# Altium PCB WSN_v1.PcbDoc
Units mil, origin at the board's own origin, x right, y up, seen from the top; angles counter-clockwise.
Board outline 1968.5 x 2165.35 mil, 2 copper layers (Top Layer, Bottom Layer); 39 components, 56 nets, 232 pads, 66 vias.
Unrouted connection lines stored in the file: 2.
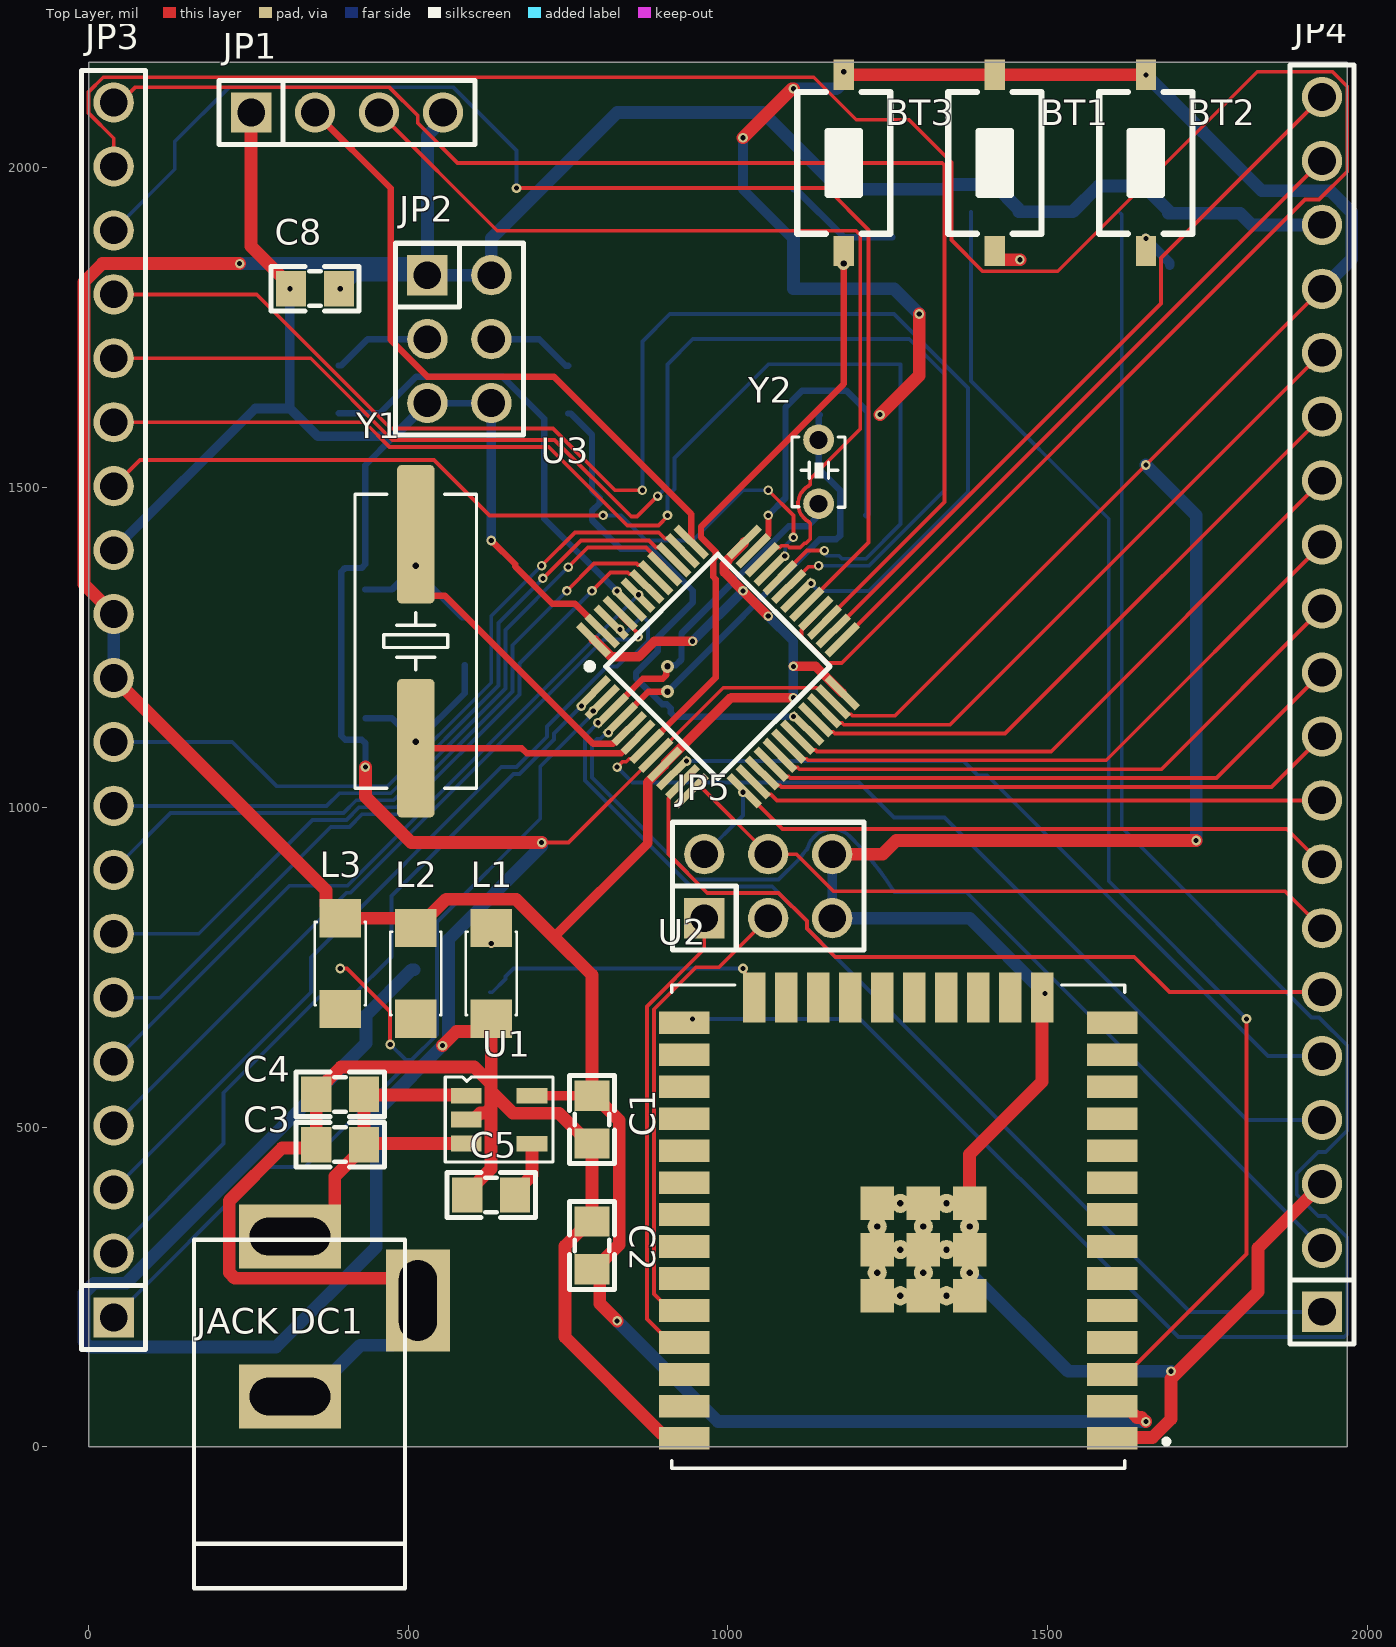
[diagram p0: Top Layer view]
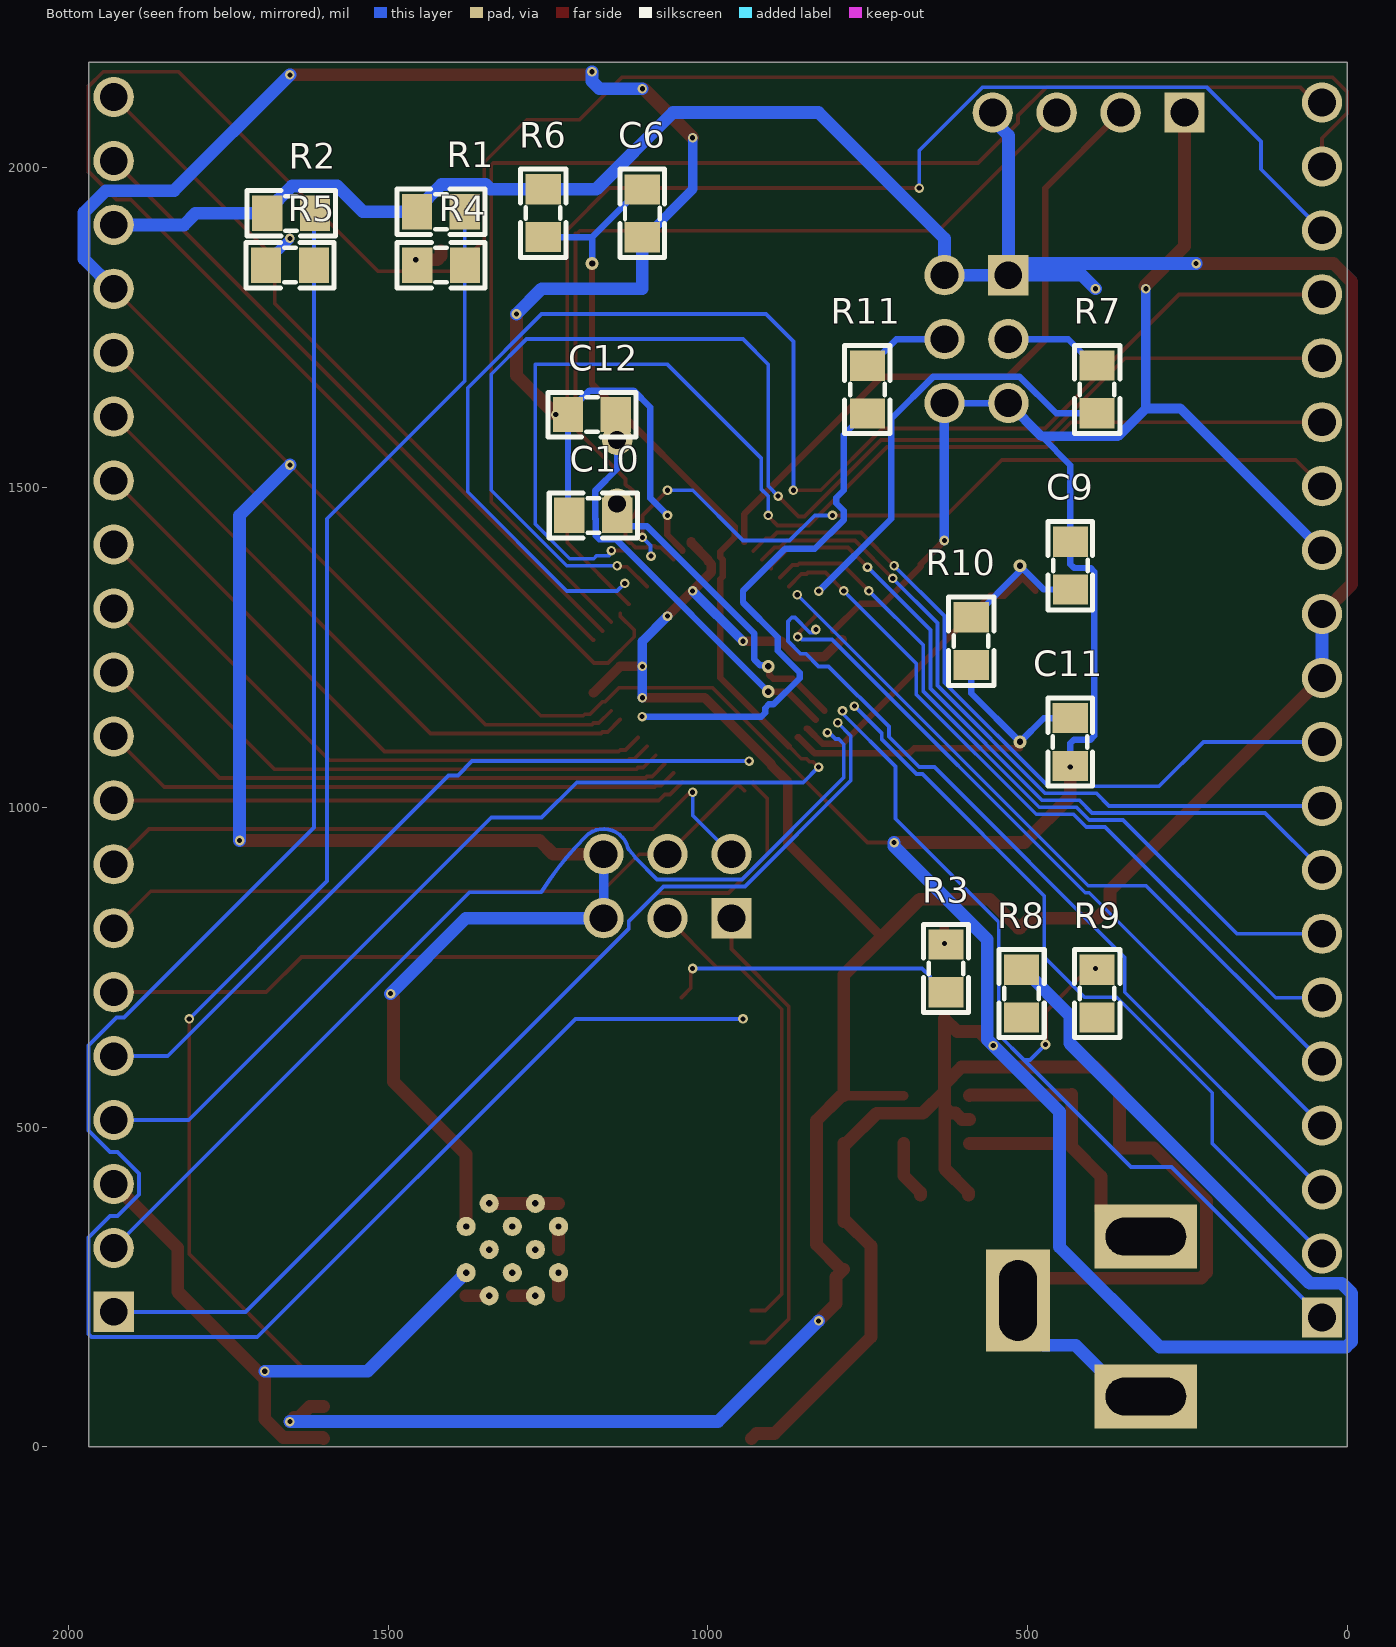
[diagram p1: Bottom Layer view, seen from below]
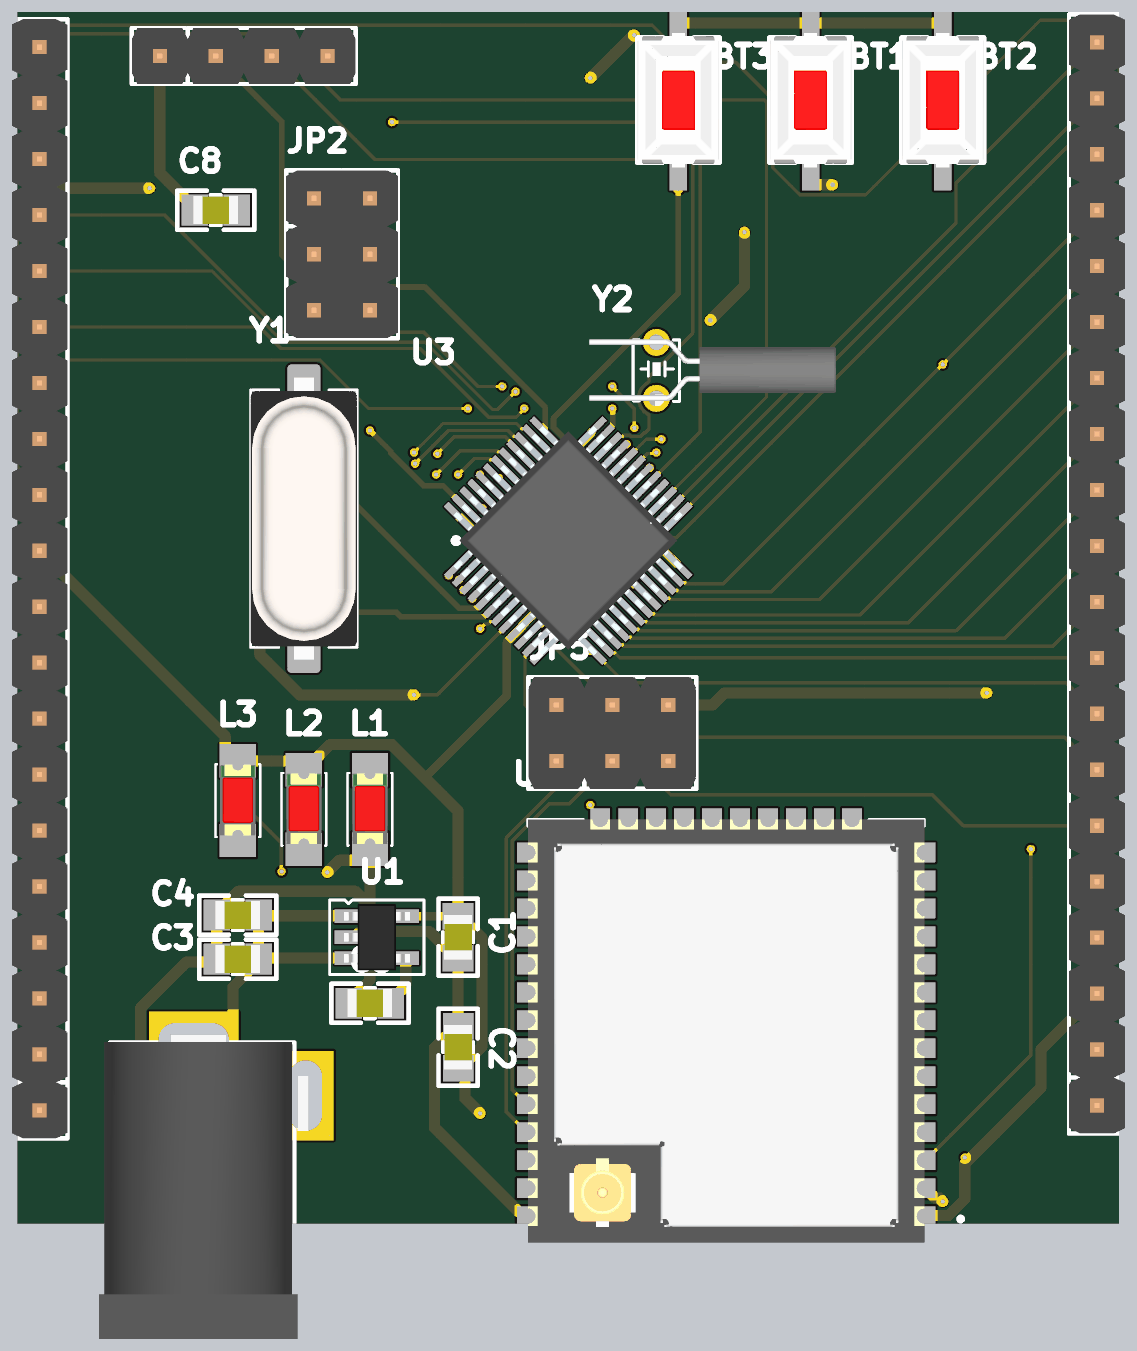
[diagram p2: 3D render of the assembled board from above, using the file's embedded part models]
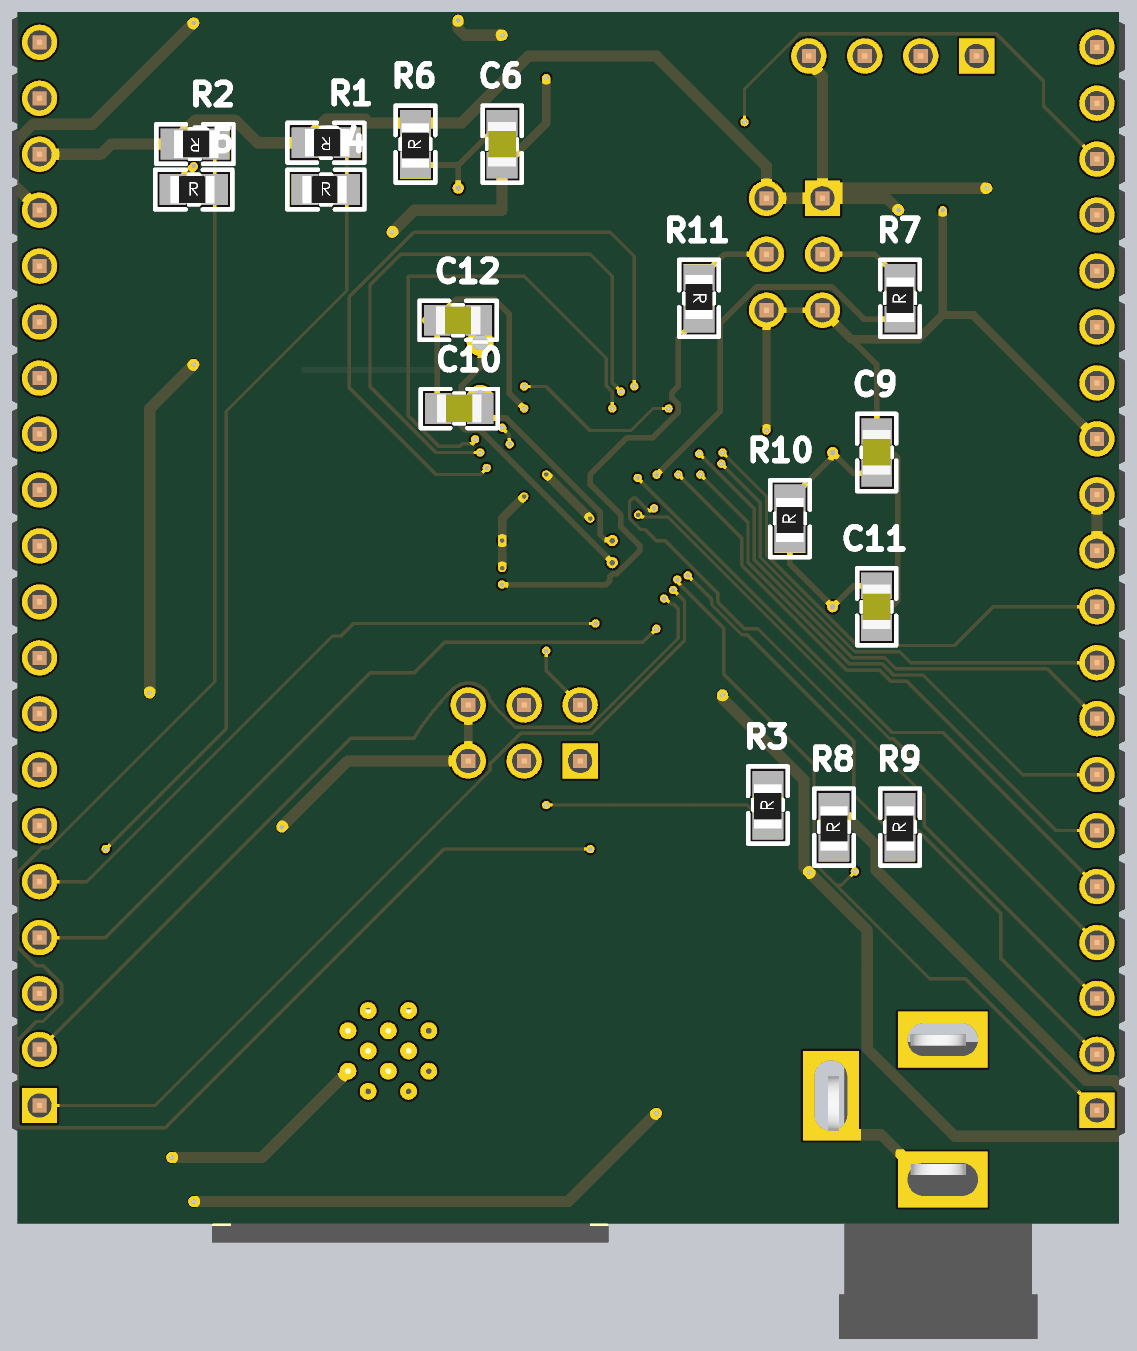
[diagram p3: 3D render of the assembled board from below, using the file's embedded part models]

## Layer stack, top to bottom
Top Solder: solder mask 0.4, Solder Resist, Dk 3.5
Top Layer: signal copper 1.4
Dielectric 1: dielectric 12.6, FR-4, Dk 4.8
Bottom Layer: signal copper 1.4
Bottom Solder: solder mask 0.4, Solder Resist, Dk 3.5

## Board outline
0,0 1968.5,0 1968.5,2165.35 0,2165.35

## Design rules (kind name [scope] priority, off if disabled: settings)
Clearance [All] p1: gap=5 ignorepadtopadclearanceinfootprint=FALSE
PolygonConnect [All] p1: connectstyle=Relief reliefconductorwidth=10 reliefentries=4 polygonreliefangle="90 Angle" airgapwidth=10
RoutingVias [All] p1: holewidth=28 width=50 viastyle="Through Hole" minholewidth=8 minwidth=15 maxholewidth=15 maxwidth=30
SolderMaskExpansion [All] p1: expansion=4 istentingtop=FALSE
Width [All] p1: maxlimit=20 minlimit=6 preferedwidth=15 minimp=50.000000 maximp=50.000000 favimp=50.000000
30 further rules are at their usual default settings.

## Components (designator, comment, footprint, x,y, rotation, side; value= is the part's Value field where it differs from the comment)
BT1 "Nut Nhan 2 Chan SMD 3x6x2.5" "Nut Nhan 2 Chan SMD 3x6x2.5" 1417.32,2007.87 r90 top
BT2 "Nut Nhan 2 Chan SMD 3x6x2.5" "Nut Nhan 2 Chan SMD 3x6x2.5" 1653.54,2007.87 r90 top
BT3 "Nut Nhan 2 Chan SMD 3x6x2.5" "Nut Nhan 2 Chan SMD 3x6x2.5" 1181.1,2007.87 r270 top
C1 "104" "tu 0805" 787.4,511.81 r270 top
C2 "104" "tu 0805" 787.4,314.96 r90 top
C3 "104" "tu 0805" 393.7,472.44 r180 top
C4 "104" "tu 0805" 393.7,551.18 r180 top
C5 "104" "tu 0805" 629.92,393.7 r180 top
C6 "104" "tu 0805" 1102.36,1929.13 r270 bottom
C8 "104" "tu 0805" 354.33,1811.02 r180 top
C9 "20pF" "tu 0805" 433.07,1377.95 r90 bottom
C10 "20pF" "tu 0805" 1178.96,1456.56 r0 bottom
C11 "20pF" "tu 0805" 433.07,1102.36 r270 bottom
C12 "20pF" "tu 0805" 1181.1,1614.17 r0 bottom
"JACK DC1" "JACK DC 5.5" "JACK DC 5.5" 414.96,203.74 r90 top value="Jac DC"
JP1 "JP 1x4 2.54" "JP 1x4 DT" 254.33,2086.61 r0 top
JP2 "JP 2x3 2.54" "JP 2x3 DT" 579.92,1732.28 r270 top
JP3 "JP 1x20 2.54" "JP 1x20 DT" 39.37,202.36 r90 top
JP4 "JP 1x20 2.54" "JP 1x20 DT" 1929.13,211.02 r90 top
JP5 "JP 2x3 2.54" "JP 2x3 DT" 1062.99,876.77 r0 top
L1 "LED 0805" LED-1206-Red 629.92,811.29 r270 top
L2 "LED 0805" LED-1206-Red 511.81,811.29 r270 top
L3 "LED 0805" LED-1206-Red 393.7,826.77 r270 top
R1 "12k" "tro smd 0805" 1417.32,1929.13 r0 bottom
R2 "12k" "tro smd 0805" 1651.4,1926.74 r0 bottom
R3 "300R" "Tro SMD 0805" 629.92,748.03 r90 bottom
R4 "470R" "Tro SMD 0805" 1417.32,1850.39 r180 bottom
R5 "470R" "Tro SMD 0805" 1653.54,1850.39 r180 bottom
R6 "10k" "tro smd 0805" 1259.84,1929.13 r90 bottom
R7 "100k" "tro smd 0805" 393.7,1653.54 r90 bottom
R8 "300R" "Tro SMD 0805" 511.81,708.66 r90 bottom
R9 "300R" "Tro SMD 0805" 393.7,708.66 r90 bottom
R10 "1M" "tro smd 0805" 590.55,1259.84 r90 bottom
R11 "100k" "tro smd 0805" 748.03,1653.54 r270 bottom
U1 "RT9193-33GB" SOT23-5 642.13,511.71 r270 top
U2 "ESP32-WROOM-32U" XCVR_ESP32-WROOM-32U 1266.34,344.29 r180 top
U3 "STM32F103C8T6" LQFP-48_19.6_393_58X11_SMD 984.25,1220.47 r45 top
Y1 "8Mhz" "Thach Anh 2 chan SMD" 511.81,1259.84 r90 top value=4Mhz
Y2 "32.768khz" "Thach Anh 2 Chan 32,768 KHz" 1141.73,1574.8 r0 top value=4Mhz

## Footprints (in the part's own frame and the unit in brackets; to place one, negate y for a bottom-side part, rotate by r counter-clockwise, add the part's x,y. Pads: shape width x height; smd on the part's side, far side on the other; paste and mask are expansions set on the pad)
"JACK DC 5.5" [mil] "Jac DC input"
  rect 100x160 hole 59.06 slot 125.98 at 90 deg: 1(125,100) 2(-125,100)
  rect 160x100 hole 59.06 slot 125.98 at 0 deg: 3(25,-100)
  silkscreen extent -425,-80 120,250, body extent -410,-105 134,269, height 434
"JP 1x4 DT" [mm] "4 pins, 1 row, straight, gold plating"
  rect 1.6x1.6 hole 1.1: 1(0,0)
  round 1.6 hole 1.1: 2(2.54,0) 3(5.08,0) 4(7.62,0)
  silkscreen extent -1.27,-1.27 8.89,1.27, body extent -1.27,-1.27 8.89,1.27, height 8.54
"JP 1x20 DT" [mm] "20 pins, 1 row, straight, gold plating"
  rect 1.6x1.6 hole 1.1: 1(0,0)
  round 1.6 hole 1.1: 2(2.54,0) 3(5.08,0) 4(7.62,0) 5(10.16,0) 6(12.7,0) 7(15.24,0) 8(17.78,0) 9(20.32,0) 10(22.86,0) 11(25.4,0) 12(27.94,0) 13(30.48,0) 14(33.02,0) 15(35.56,0) 16(38.1,0) 17(40.64,0) 18(43.18,0) 19(45.72,0) 20(48.26,0)
  silkscreen extent -1.27,-1.27 49.53,1.27, body extent -1.27,-1.27 49.53,1.27, height 8.54
"JP 2x3 DT" [mm]
  rect 1.6x1.6 hole 1.1: 1(-2.54,-1.27)
  round 1.6 hole 1.1: 2(0,-1.27) 3(2.54,-1.27) 4(2.54,1.27) 5(0,1.27) 6(-2.54,1.27)
  silkscreen extent -3.81,-2.54 3.81,2.54, body extent -3.81,-2.54 3.81,2.54, height 8.55
LED-1206-Red [mil]
  rect 60x65 smd: 1(0,0) 2(142,0)
  silkscreen extent 6,-40 136,40, body extent 7,-31 133,32, height 43
LQFP-48_19.6_393_58X11_SMD [mm]
  rect 1.7x0.3 smd mask+0.076: 1(-4.238,2.75) 2(-4.238,2.25) 3(-4.238,1.75) 4(-4.238,1.25) 5(-4.238,0.75) 6(-4.238,0.25) 7(-4.238,-0.25) 8(-4.238,-0.75) 9(-4.238,-1.25) 10(-4.238,-1.75) 11(-4.238,-2.25) 12(-4.238,-2.75) 25(4.238,-2.75) 26(4.238,-2.25) 27(4.238,-1.75) 28(4.238,-1.25) 29(4.238,-0.75) 30(4.238,-0.25) 31(4.238,0.25) 32(4.238,0.75) 33(4.238,1.25) 34(4.238,1.75) 35(4.238,2.25) 36(4.238,2.75)
  rect 0.3x1.7 smd mask+0.076: 13(-2.75,-4.238) 14(-2.25,-4.238) 15(-1.75,-4.238) 16(-1.25,-4.238) 17(-0.75,-4.238) 18(-0.25,-4.238) 19(0.25,-4.238) 20(0.75,-4.238) 21(1.25,-4.238) 22(1.75,-4.238) 23(2.25,-4.238) 24(2.75,-4.238) 37(2.75,4.238) 38(2.25,4.238) 39(1.75,4.238) 40(1.25,4.238) 41(0.75,4.238) 42(0.25,4.238) 43(-0.25,4.238) 44(-0.75,4.238) 45(-1.25,4.238) 46(-1.75,4.238) 47(-2.25,4.238) 48(-2.75,4.238)
  silkscreen extent -3.72,-3.15 3.15,3.72, body extent -4.5,-4.5 4.5,4.5, height 1.7
"Nut Nhan 2 Chan SMD 3x6x2.5" [mm] "Switch SMD type"
  rect 1.2x0.8 smd: 1(-3.5,0) 2(3.5,0)
  silkscreen extent -2.82,-1.85 2.82,1.85, body extent -3.05,-1.85 3.05,1.85, height 2.5
SOT23-5 [mm]
  rect 0.62x1.22 smd mask+0.076: 1(-0.953,-1.31) 2(-0.003,-1.31) 3(0.947,-1.31) 4(0.952,1.31) 5(-0.953,1.31)
  silkscreen extent -1.69,-2.14 1.69,2.14, body extent -1.5,-1.5 1.5,1.5, height 1.41
"Thach Anh 2 Chan 32,768 KHz" [mil]
  round 48 hole 28: 1(0,0) 2(0,-100)
  silkscreen extent -42,-106 42,4, body extent -120,-105 321,6, height 66
"Thach Anh 2 chan SMD" [mm]
  round 0.508 on Mech15: 0(0,0)
  rrect25% 5.5x1.5 smd: 1(-4.25,0) 2(4.25,0)
  silkscreen extent -5.84,-2.41 5.84,2.41, body extent -6.4,-2.41 6.4,2.42, height 4.29
"tro smd 0805" [mm]
  rect 1.2x1.4 smd: 1(-0.946,-0.061) 2(0.954,-0.061)
  silkscreen extent -1.75,-0.97 1.75,0.84, body extent -1.56,-0.76 1.44,0.64, height 0.53
"Tro SMD 0805" [mm]
  rect 1.2x1.4 smd: 1(-0.946,-0.061) 2(0.954,-0.061)
  silkscreen extent -1.75,-0.97 1.75,0.84, body extent -1.56,-0.76 1.44,0.64, height 0.53
"tu 0805" [mm]
  rect 1.2x1.4 smd: 1(-0.946,-0.003) 2(0.954,-0.003)
  silkscreen extent -1.75,-0.89 1.75,0.89, body extent -1.01,-0.64 1.01,0.63, height 0.61
XCVR_ESP32-WROOM-32U [mm]
  rect 2x0.9 smd: 1(-8.5,8.41) 2(-8.5,7.14) 3(-8.5,5.87) 4(-8.5,4.6) 5(-8.5,3.33) 6(-8.5,2.06) 7(-8.5,0.79) 8(-8.5,-0.48) 9(-8.5,-1.75) 10(-8.5,-3.02) 11(-8.5,-4.29) 12(-8.5,-5.56) 13(-8.5,-6.83) 14(-8.5,-8.1) 25(8.5,-8.1) 26(8.5,-6.83) 27(8.5,-5.56) 28(8.5,-4.29) 29(8.5,-3.02) 30(8.5,-1.75) 31(8.5,-0.48) 32(8.5,0.79) 33(8.5,2.06) 34(8.5,3.33) 35(8.5,4.6) 36(8.5,5.87) 37(8.5,7.14) 38(8.5,8.41)
  rect 0.9x2 smd: 15(-5.715,-9.1) 16(-4.445,-9.1) 17(-3.175,-9.1) 18(-1.905,-9.1) 19(-0.635,-9.1) 20(0.635,-9.1) 21(1.905,-9.1) 22(3.175,-9.1) 23(4.445,-9.1) 24(5.715,-9.1)
  rect 1.33x1.33 smd: G.1(0.835,2.745) G.2(-1,2.745) G.4(-2.835,2.745) G.5(0.835,0.91) G.6(-1,0.91) G.7(-2.835,0.91) G.8(0.835,-0.925) G.9(-1,-0.925) G.10(-2.835,-0.925)
  round 0.762 hole 0.254: G.11(-0.082,2.745) G.12(-1.917,2.745) G.13(0.835,1.827) G.14(-1,1.827) G.15(-2.835,1.827) G.16(-0.082,0.91) G.17(-1.917,0.91) G.18(0.835,-0.008) G.19(-1,-0.008) G.20(-2.835,-0.008) G.21(-0.082,-0.925) G.22(-1.917,-0.925)
  silkscreen extent -10.75,-9.6 9,9.6, body extent -9,-9.6 9,9.6, height 3.3

## Part data
C1 C2 C3 C4 C5 C6 C8: library part "Tu 0805 104 50V 10%", "Dán", Chung_Loai=Dán, Don_Vi=Con, Ma_Hang=MH004551, So_Chan=2, Ten_Linh_Kien="Tụ 0805 104-100nF 10% 50V"
C9 C10 C11 C12: library part "Tu 0805 20pF 50V 10%", "Dán", Chung_Loai=Dán, Don_Vi=Con, Ma_Hang=MH004558, So_Chan=2, Ten_Linh_Kien="Tụ 0805 20P 10% 50V"
JP1: library part "JP 1x4 2.54 Duc Thang", "Cắm", Chung_Loai=Cắm, Don_Vi=Con, Ma_Hang=MH000903, Ten_Linh_Kien="Jump Đơn Đực 2.54MM 1x40P Thẳng 11MM"
JP2 JP5: library part "JP 2x3 2.54 Duc Thang", "Cắm", Chung_Loai=Cắm, Don_Vi=Con, Ma_Hang=MH002686, Ten_Linh_Kien="Jump Đôi Đực 2.54MM 2x40P Thẳng 11MM"
JP3 JP4: library part "JP 1x20 2.54 Duc Thang", "Cắm", Chung_Loai=Cắm, Don_Vi=Con, Ma_Hang=MH000903, Ten_Linh_Kien="Jump Đơn Đực 2.54MM 1x40P Thẳng 11MM"
L1 L2 L3: library part "LED 1206 Do", "Dán", Chung_Loai=Dán, Don_Vi=Con, Ma_Hang=MH002334, Ten_Linh_Kien="LED1206 Màu Đỏ (Red)"
R1 R2: library part "Tro 0805 1% 12k", "Dán", Chung_Loai=Dán, Don_Vi=Con, Ma_Hang=MH005475, So_Chan=2, Ten_Linh_Kien="Trở 0805 1% 12k"
R3 R8 R9: library part "Tro 0805 5% 300R", "Dán", Chung_Loai=Dán, Don_Vi=Con, Ma_Hang=MH005335, So_Chan=2, Ten_Linh_Kien="Trở 0805 5% 300R"
R4 R5: library part "Tro 0805 5% 470R", "Dán", Chung_Loai=Dán, Don_Vi=Con, Ma_Hang=MH005341, So_Chan=2, Ten_Linh_Kien="Trở 0805 5% 470R"
R6: library part "Tro 0805 5% 10k", "Dán", Chung_Loai=Dán, Don_Vi=Con, Ma_Hang=MH005239, So_Chan=2, Ten_Linh_Kien="Trở 0805 5% 10k"
R7 R11: library part "Tro 0805 5% 100k", "Dán", Chung_Loai=Dán, Don_Vi=Con, Ma_Hang=MH005250, So_Chan=2, Ten_Linh_Kien="Trở 0805 5% 100k"
R10: library part "Tro 0805 5% 1M", "Dán", Chung_Loai=Dán, Don_Vi=Con, Ma_Hang=MH005235, So_Chan=2, Ten_Linh_Kien="Trở 0805 5% 1M"
U1: library part REG_5.5V-3.3V-0.3A-1W-SOT-23-5, "Linear Voltage Regulator IC 1 Output 300mA SOT-23-5", Alternate Part Number-1=NA, Case/Package=SOT-23-5, Manufacturer="Richtek USA Inc.", Supplier Part Number-1=C15651, Manufacturer Part Number=RT9193-33GB, Supplier-1=LCSC
U2: "Bluetooth, WiFi 802.11b/g/n, Bluetooth v4.2 +EDR, Class 1, 2 and 3 Transceiver Module 2.4GHz ~ 2.5GHz Antenna Not Included, U.FL Surface Mount", Package="NON STANDARD-39 Espressif", Availability="Not in stock", Check_prices=https://www.snapeda.com/parts/ESP32-WROOM-32U/Espressif+Systems/view-part/?ref=eda, MF="Espressif Systems", MP=ESP32-WROOM-32U, Price=None, SnapEDA_Link=https://www.snapeda.com/parts/ESP32-WROOM-32U/Espressif+Systems/view-part/?ref=snap
U3: library part IC_STM32F103C8T6, "ARM® Cortex®-M3 STM32F1 Microcontroller IC 32-Bit 72MHz 64KB (64K x 8) FLASH 48-LQFP (7x7)", Alternate Part Number-1=NA, Case/Package=LQFP48, Manufacturer=STMicroelectronics, Manufacturer Part Number=STM32F103C8T6, Supplier Part Number-1=STM32F103C8T6, Supplier-1=LCSC
Y1: library part "Thach Anh 2 chan SMD", "Crystal For all Crystal 2pin."
Y2: library part "Thach Anh 2 chan 32,768 Khz", "Crystal For all Crystal 2pin."
BT1 BT2 BT3: Ma_Hang=MH001036, Ten="Nút Nhấn 2 Chân 3x6x2.5MM SMD"

## Via types
v1: diameter 15, hole 8, Top Layer to Bottom Layer, 61 vias
v2: diameter 20, hole 10, Top Layer to Bottom Layer, 5 vias

## Nets (pads, with @x,y where several pads share a name; then routed paths per layer and width w, separated by ;. In a path a pad name is that pad's centre, name@x,y a point inside that pad or via, vN(x,y) a via of type N, cw(c..) or ccw(c..) an arc to the next point about the centre after c; other vN are vias at no path point)
5V: "JACK DC1.1" C3.1 C4.1 U1.1 U1.3 | length 609.1
  Top Layer w20: 314.96,328.74 344.96,328.74 384.96,368.74 384.96,422.67 430.93,468.64 C3.1 ; U1.3 432.76,474.41 C3.1 ; U1.1 589.5,550.26 431.98,550.26 C4.1 C3.1
BOOT0: R7.1 U3.44 | length 689.6
  Bottom Layer w10: R7.1 455.27,1616.32 512.73,1673.78 647.11,1673.78 712.87,1608.02 712.87,1451.49 826.06,1338.29 v1(826.48,1338.29)
BOOT1: R11.2 U3.20 | length 846.5
  Bottom Layer w10: R11.2 754.36,1615.97 787.4,1582.93 787.4,1496.06 799.35,1484.12 799.35,1475.84 787.4,1463.89 787.4,1449.39 832.47,1404.32 879.14,1404.32 944.88,1338.58 944.88,1320.43 890.51,1266.06 890.51,1244.84 856.14,1210.47 856.14,1202.19 897.23,1161.1 904.49,1161.1 910.35,1155.24 910.35,1147.98 916.6,1141.73 1102.36,1141.73 v1(1102.65,1142.02)
EN: R1.1 R4.2 U2.3 | length 2096.5
  Top Layer w6: U2.3 1622.64,113.19 1811.02,301.57 v1(1811.02,669.29)
  Bottom Layer w6: R1.1 1380.09,1666.96 1595.56,1451.49 1595.56,884.76 v1(1811.02,669.29)
GND: "JACK DC1.2" "JACK DC1.3" BT1.2 BT2.2 BT3.1 C1.2 C2.2 C3.2 C4.2 C5.2 C6.2 C8.2 C9.2 C10.2 C11.2 C12.2 JP1.1 JP2.3 JP2.4 JP3.13 JP4.3 JP4.17 JP5.3 JP5.4 L1.2 R8.2 U1.2 U2.1 U2.15 U2.38 U2.G.1 U2.G.2 U2.G.4 U2.G.5 U2.G.6 U2.G.7 U2.G.8 U2.G.9 U2.G.10 U2.G.11 U2.G.12 U2.G.13 U2.G.14 U2.G.15 U2.G.16 U2.G.17 U2.G.18 U2.G.19 U2.G.20 U2.G.21 U2.G.22 U3.8 U3.23 U3.35 U3.47 | length 14527.7
  Top Layer w6: v1(708.66,944.88) 750.42,944.88 U3.8 992.59,1187.05 1138.84,1187.05 1160.76,1165.13 U3.23 1184.36,1145.64 1192.53,1145.64 1194.96,1143.21 1261.32,1143.21 JP4.17
  Top Layer w10: v1(629.92,1417.32) 667.16,1380.09 667.16,1376.83 725.41,1318.58 760.87,1318.58 U3.47 ; U3.35 1039.6,1402.37 1063.51,1426.29 1063.51,1456.17 v1(1062.99,1456.69)
  Top Layer w20: JP1.1 254.33,1877.52 C8.2@316.76,1815.09 ; v1(433.07,1062.99) 433.07,1016.58 504.77,944.88 v1(708.66,944.88) ; 514.96,228.74 479.96,263.74 228.75,263.74 219.96,272.53 219.96,384.95 302.5,467.5 351.05,467.5 C3.2 C4.2 356.13,555.25 394.75,593.87 603.32,593.87 629.57,567.63 629.57,530.8 ; v1(553.59,627.51) 553.67,627.43 575.52,649.29 609.92,649.29 L1.2 629.92,555.56 663.77,521.71 735.86,521.71 783.33,474.24 C1.2 787.4,474.1 787.4,352.67 C2.2 783.6,352.53 744.98,313.91 744.98,171.61 895.68,20.91 923.98,20.91 U2.38 ; U1.2 602.36,511.81 612.56,522.01 620.78,522.01 629.57,530.8 ; C5.2 592.35,397.77 629.57,434.99 629.57,530.8 ; v1(1023.62,2047.24) 1100.24,2123.86 v1(1102.36,2123.86) ; JP5.4 1241.73,926.77 1263.23,948.27 v1(1732.28,948.27) ; BT3.1 BT1.2 v1(1653.54,2145.67) ; U2.G.1 U2.G.13 ; U2.G.5 U2.G.18 ; U2.G.8 U2.G.21 U2.G.9 U2.G.22 ; v1(1237.85,1614.17) 1299.21,1675.54 v1(1299.21,1771.65) ; U2.G.11 U2.G.2 ; U2.G.12 U2.G.4 ; U2.G.20 U2.G.10 1377.95,457.41 1491.34,570.79 U2.15 ; U2.1 1602.17,14.37 1663.9,14.37 1692.91,43.38 1692.91,106.48 1829.02,242.59 1829.02,310.91 JP4.3
  Bottom Layer w10: C11.2 433.2,1100.11 427.35,1105.97 401.5,1105.97 395.38,1112.09 395.38,1368.49 401.24,1374.35 427.08,1374.35 432.94,1380.2 C9.2 432.94,1535.3 477.83,1580.19 ; JP2.3 JP2.4 ; v1(1062.99,1456.69) 1090.03,1483.73 1090.03,1625.79 1116.11,1651.87 1185.05,1651.87 1218.68,1618.24 C12.2 1218.68,1458.84 C10.2
  Bottom Layer w15: JP3.13 260.81,1623.8 314.96,1623.8 ; v1(314.96,1811.02) 314.96,1623.8 ; JP2.3 477.83,1580.19 358.57,1580.19 314.96,1623.8 ; v1(629.92,1417.32) JP2.4 ; v1(1023.62,2047.24) 1023.62,1966.5 1098.56,1891.56 C6.2 ; JP5.3 JP5.4
  Bottom Layer w20: 314.96,78.74 344.96,78.74 424.96,158.74 474.96,158.74 514.96,198.74 514.96,228.74 ; R8.2 505.48,746.24 433.87,674.62 433.87,631.1 58.63,255.87 8.67,255.87 -7.13,240.07 -7.13,164.65 1.66,155.87 293.3,155.87 449.96,312.53 449.96,524.03 562.98,637.04 562.98,793.45 708.66,939.13 v1(708.66,944.88) ; v1(1102.36,2123.86) 1169.39,2123.86 1181.1,2135.57 v1(1181.1,2150.46) ; C6.2 1102.5,1811.02 1259.84,1811.02 v1(1299.21,1771.65) ; JP5.3 1377.95,826.77 v1(1496.06,708.66) ; U2.G.15 1532.19,118.11 v1(1692.91,118.11) ; v1(1653.54,1535.43) 1732.28,1456.69 v1(1732.28,948.27) ; v1(1653.54,2145.67) 1834.69,1964.53 1941.39,1964.53 1975.63,1930.28 1975.63,1857.52 JP4.17
IO0: R2.1 R5.2 U2.25 | length 3217.6
  Bottom Layer w6: v1(944.88,669.29) 1206.75,669.29 1704.51,171.53 1963.94,171.53 1968.63,176.21 1968.63,327.38 1934.99,361.02 1923.28,361.02 1889.64,394.66 1889.64,427.38 1923.28,461.02 1934.99,461.02 1968.63,494.66 1968.63,627.38 1924.49,671.53 1912.77,671.53 1615.97,968.33 R5.2 1615.97,1927.34 R2.1
IO2: R3.1 U2.24 | length 466.6
  Top Layer w6: v1(1023.62,748.03) 1023.62,745.6 1026.62,742.6 1026.62,717.28 U2.24
  Bottom Layer w6: R3.1 631.46,710.8 652.09,731.43 652.09,735.36 664.76,748.03 v1(1023.62,748.03)
NetBT1_1: BT1.1 R4.1 | length 49.6
  Top Layer w20: BT1.1 1417.32,1862.2 1423.07,1856.46 v1(1456.69,1856.46)
NetBT2_1: BT2.1 R5.1 | length 57.2
  Bottom Layer w15: v1(1653.54,1889.76) 1653.54,1889.17 1690.77,1851.94 R5.1
NetC5_1: C5.1 U1.4 | length 91.4
  Top Layer w20: C5.1 667.15,397.77 693.7,424.32 U1.4
NetJP2_2: JP2.2 R7.2 | length 155.7
  Bottom Layer w10: R7.2 395.24,1691.12 436.41,1732.28 JP2.2
NetJP2_5: JP2.5 R11.1 | length 137.7
  Bottom Layer w10: JP2.5 704.98,1732.28 746.49,1690.77 R11.1
NetL1_1: L1.1 R3.2 | length 23.9
  Top Layer w15: v1(629.92,787.4) L1.1
NetL2_2: L2.2 R8.1
NetL3_2: L3.2 R9.1
OSCIN: C9.1 R10.2 U3.5 Y1.2 | length 715.1
  Top Layer w10: Y1.2@487.46,1338.58 Y1.2@511.81,1362.93 ; v2(511.81,1377.95) Y1.2@511.81,1362.93 ; U3.5 844.11,1123.37 820.19,1099.45 789.1,1099.45 557.27,1331.28 536.16,1331.28 511.81,1355.62 Y1.2@511.81,1362.93
  Bottom Layer w10: C9.1 474.58,1340.72 v2(511.81,1377.95) 511.81,1369.83 584.22,1297.42 R10.2
OSCOUT: C11.1 R10.1 U3.6 Y1.1 | length 607.1
  Top Layer w10: Y1.1 677.25,1092.52 685.32,1084.45 833.03,1084.45 858.03,1109.45 U3.6
  Bottom Layer w10: C11.1 474.58,1139.59 v2(511.81,1102.36) 588.16,1178.71 R10.1
PA0: JP4.5 U3.10 | length 1184.8
  Bottom Layer w6: v1(935.45,1072.42) 1368.52,1072.42 1390.82,1050.12 1405.59,1050.12 1844.69,611.02 JP4.5
PA1: JP4.6 U3.11 | length 1240.4
  Top Layer w6: U3.11 928.91,1035.75 906.99,1013.83 906.99,926.92 967.64,866.27 1079.35,866.27 1123.5,822.12 1123.5,810.41 1167.74,766.17 1635.4,766.17 1690.55,711.02 JP4.6
PA4: JP4.9 U3.14 | length 901.5
  Top Layer w6: U3.14 1059.08,1020.37 1067.26,1020.37 1076.6,1011.02 JP4.9
PA5: JP4.10 U3.15 | length 917.5
  Top Layer w6: U3.15 1073,1034.29 1081.18,1034.29 1083.61,1031.85 1849.96,1031.85 JP4.10
PA6: JP4.11 U3.16 | length 939.2
  Top Layer w6: U3.16 1086.92,1048.21 1095.09,1048.21 1097.53,1045.77 1763.88,1045.77 JP4.11
PA7: JP4.12 U3.17 | length 961
  Top Layer w6: U3.17 1100.84,1062.12 1109.02,1062.12 1111.45,1059.69 1677.8,1059.69 JP4.12
PA8: JP3.18 U3.29 | length 2051.3
  Top Layer w6: v1(669.29,1968.5) 1154.57,1968.5 1219.85,1903.23 1219.85,1414.31 U3.29
  Bottom Layer w6: JP3.18 134.9,1997.89 134.9,2041.49 219.52,2126.11 570.69,2126.11 669.29,2027.51 v1(669.29,1968.5)
PA11: JP3.15 U3.32 | length 1935.1
  Top Layer w6: JP3.15 431.94,1602.36 470.5,1563.8 719.66,1563.8 842.52,1440.94 891.15,1440.94 905.51,1455.3 v1(905.51,1456.69) ; U3.32 1123.65,1401.63 v1(1150.79,1401.63)
  Bottom Layer w6: v1(905.51,1456.69) 905.51,1486.84 916.51,1497.84 916.51,1546.43 1062.99,1692.91 1269.92,1692.91 1269.92,1442.96 1215.92,1388.95 1178.33,1388.95 1173.83,1393.45 1154.31,1393.45 1154.31,1395.68 1150.79,1399.2 v1(1150.79,1401.63)
PA12: JP3.14 U3.33 | length 1250.6
  Top Layer w6: JP3.14 80.44,1543.43 540.33,1543.43 627.07,1456.69 804.85,1456.69 v1(804.9,1456.64) ; v1(1062.99,1496.06) 1102.36,1456.69 v1(1102.36,1422.16)
  Bottom Layer w6: v1(804.9,1456.64) 832.72,1456.64 872.04,1417.32 944.88,1417.32 1023.62,1496.06 v1(1062.99,1496.06) ; v1(1088.86,1392.87) 1089.57,1393.58 1089.57,1409.37 v1(1102.36,1422.16)
PA15: JP3.10 U3.38 | length 1155.5
  Top Layer w6: v1(708.66,1377.95) 760.65,1429.94 891.88,1429.94 901.25,1420.58 909.42,1420.58 U3.38
  Bottom Layer w6: JP3.10 224.84,1102.36 294.03,1033.17 468.07,1033.17 629.92,1195.02 629.92,1299.21 v1(708.66,1377.95)
PB0: JP4.13 U3.18 | length 982.7
  Top Layer w6: U3.18 1114.76,1076.05 1122.93,1076.05 1125.37,1073.61 1591.72,1073.61 JP4.13
PB1: JP4.14 U3.19 | length 1004.4
  Top Layer w6: U3.19 1128.68,1089.96 1136.85,1089.96 1139.29,1087.53 1505.64,1087.53 JP4.14
PB3: JP3.9 U3.39 | length 1117.3
  Top Layer w6: v1(710.68,1358.06) 769.95,1417.32 876.66,1417.32 887.33,1406.66 895.5,1406.66 U3.39
  Bottom Layer w6: JP3.9 372.44,1002.36 392.24,1022.17 472.63,1022.17 640.92,1190.46 640.92,1288.29 v1(710.68,1358.06)
PB4: JP3.8 U3.40 | length 1140.1
  Top Layer w6: v1(750.27,1375.72) 780.87,1406.32 872.11,1406.32 901.07,1377.36 U3.40
  Bottom Layer w6: JP3.8 128.37,991.36 398.92,991.36 418.72,1011.17 477.18,1011.17 651.92,1185.9 651.92,1277.37 v1(750.27,1375.72)
PB5: JP3.7 U3.41 | length 1138.9
  Top Layer w6: v1(748.03,1338.58) 790.7,1381.25 857.06,1381.25 859.49,1378.82 867.66,1378.82 U3.41
  Bottom Layer w6: JP3.7 172.44,802.36 350.44,980.36 403.47,980.36 423.28,1000.17 481.74,1000.17 662.92,1181.35 662.92,1253.47 v1(748.03,1338.58)
PB6: JP3.6 U3.42 | length 1146.7
  Top Layer w6: v1(787.4,1338.58) 816.15,1367.33 843.14,1367.33 845.57,1364.9 853.74,1364.9 U3.42
  Bottom Layer w6: JP3.6 111.81,702.36 378.81,969.36 408.03,969.36 427.83,989.17 486.3,989.17 673.92,1176.79 673.92,1225.1 v1(787.4,1338.58)
PB7: JP3.5 U3.43 | length 1123.2
  Bottom Layer w6: JP3.5 314.51,877.5 405.06,877.5 v1(860.09,1332.53)
PB8: JP3.4 U3.45 | length 1185
  Top Layer w6: U3.45 831.47,1299.55 857.59,1273.43 857.59,1268.4 v1(859.31,1266.67)
  Bottom Layer w6: JP3.4 403.51,866.5 409.62,866.5 805.78,1262.67 852.87,1262.67 856.88,1266.67 v1(859.31,1266.67)
PB9: JP3.3 U3.46 | length 1320.6
  Bottom Layer w6: JP3.3 347.92,710.91 347.92,765.35 645.57,1062.99 669.29,1062.99 716.84,1110.54 716.84,1126.28 811.03,1220.47 826.77,1220.47 846.66,1240.36 854.92,1240.36 874.81,1260.25 874.81,1290.54 868.63,1296.73 863.66,1296.73 840.6,1273.67 834.45,1273.67 830.93,1277.18 v1(830.93,1278.17)
PB12: JP4.19 U3.25 | length 1060.6
  Top Layer w6: U3.25 1179.4,1261.9 1928.53,2011.02 JP4.19
PB13: JP4.20 U3.26 | length 1151.8
  Top Layer w6: U3.26 1677.29,1788.24 1677.29,1859.18 JP4.20
PB14: JP3.20 U3.27 | length 2158.7
  Top Layer w6: JP3.20 49.14,2102.36 72.89,2126.11 470.69,2126.11 514.83,2081.97 514.83,2070.25 577.21,2007.87 1335.07,2007.87 1338.58,2004.36 1338.58,1477.37 U3.27
PB15: JP3.19 U3.28 | length 3814.2
  Top Layer w6: JP3.19 39.37,2046.51 -0.13,2086 -0.13,2118.72 23.01,2141.86 1134.23,2141.86 1200.7,2075.39 1283.11,2075.39 1349.58,2008.92 1349.58,1887.13 1398.26,1838.46 1515.85,1838.46 1827.91,2150.52 1945.49,2150.52 1968.63,2127.38 1968.63,1994.66 1924.49,1950.52 1902.47,1950.52 1178.01,1226.06 1155.99,1226.06 1115.11,1266.93 1115.11,1277.63 1137.03,1299.55 U3.28
PC13: JP3.1 R9.2 U3.2 | length 1497.2
  Top Layer w6: v1(393.7,748.03) 404.25,748.03 471.31,680.97 471.31,629.82 v1(471.92,629.21)
  Bottom Layer w6: JP3.1 274.69,437.68 338.16,437.68 505.31,604.83 ; v1(471.92,629.21) 496.3,604.83 505.31,604.83 ; v1(789.35,1150.85) 789.35,1148.41 787.4,1146.46 787.4,1144.79 706.54,1063.92 706.54,982.13 544.98,820.57 544.98,644.5 505.31,604.83
PC14: C10.1 JP4.1 U3.3 Y2.2 | length 2102.3
  Top Layer w10: U3.3 837.4,1171.05 837.4,1171.62 866.88,1201.1 897.81,1201.1 903.67,1206.96 903.67,1218.63 v2(905.51,1220.47)
  Bottom Layer w6: v1(796.83,1132.3) 776.4,1111.87 776.4,1041.95 942.08,876.28 1069.34,876.28 1123.5,822.12 1123.5,810.41 1722.88,211.02 JP4.1
  Bottom Layer w10: v2(905.51,1220.47) 907.43,1222.39 918.38,1222.39 927.38,1231.39 927.38,1271.93 1095.11,1439.66 1124.7,1439.66 C10.1 Y2.2
PC15: C12.1 JP4.2 U3.4 Y2.1 | length 2272.3
  Top Layer w10: U3.4 875.29,1181.1 v2(905.51,1181.1)
  Bottom Layer w6: v1(812.94,1116.95) 810.51,1116.95 800.3,1106.74 795.3,1106.74 787.4,1098.85 787.4,1046.51 946.63,887.28 1079.35,887.28 1112.51,920.44 1112.99,920.92 cw(c1172.32,884.06) 1123.12,933.63 ccw(c1118.87,937.87) 1124.68,936.38 cw(c1162.99,926.77) 1190.92,954.7 cw(c844.48,608.25) 1260.35,867.28 1372.88,867.28 JP4.2
  Bottom Layer w10: v2(905.51,1181.1) 1143.54,1419.13 1169.5,1419.13 1175.35,1424.99 1175.35,1450.95 1175.73,1451.32 1175.73,1495.62 1141.73,1529.62 Y2.1 1141.73,1612.17 C12.1
RESET: BT3.2 C6.1 JP4.4 R6.1 U3.7 | length 2542.5
  Top Layer w6: v1(826.77,1062.99) 835.23,1071.45 840.98,1071.45 845.57,1076.05 853.74,1076.05 U3.7
  Top Layer w10: U3.7 980.67,1202.97 980.67,1356.79 976.83,1360.62 976.83,1387.55 980.67,1391.38 980.67,1399.67 957.83,1422.5 957.83,1438.98 1181.1,1662.26 BT3.2@1181.1,1850.82 ; v2(1180.89,1850.61) BT3.2@1181.1,1850.82 ; BT3.2 BT3.2@1181.1,1850.82
  Bottom Layer w6: v1(826.77,1062.99) 850.64,1039.12 1204.97,1039.12 1259.84,984.25 1338.58,984.25 1811.81,511.02 JP4.4
  Bottom Layer w10: C6.1 1106.43,1966.36 1180.89,1891.91 ; v2(1180.89,1850.61) 1180.89,1891.91 ; R6.1 1180.89,1891.91
RX1: JP3.16 U3.31 | length 2138
  Top Layer w6: JP3.16 347.5,1702.36 475.06,1574.8 729,1574.8 848.9,1454.9 858.01,1454.9 v1(889.97,1486.85) ; U3.31 1126.09,1376.23 1140.01,1376.23 v1(1141.73,1377.95)
  Bottom Layer w6: v1(889.97,1486.85) 905.51,1502.39 905.51,1692.91 944.88,1732.28 1283.66,1732.28 1338.58,1677.36 1338.58,1496.06 1220.47,1377.95 v1(1141.73,1377.95)
RX2: JP4.8 JP5.6 U3.13 | length 1072.8
  Top Layer w6: U3.13@1025.81,1025.81 1085.34,966.27 1873.89,966.27 JP4.8
  Bottom Layer w6: JP5.6 1023.62,987.4 v1(1023.62,1023.62)
RX3: JP4.16 U3.22 | length 1028.2
  Top Layer w6: U3.22 1170.44,1131.72 1178.61,1131.72 1181.04,1129.29 1347.4,1129.29 JP4.16
SWCLK: JP1.2 U3.37 | length 1031.4
  Top Layer w10: JP1.2 472.44,1968.5 472.44,1731.08 529.74,1673.78 727.8,1673.78 942.83,1458.75 U3.37
SWDIO: JP1.3 U3.34 | length 1446.2
  Top Layer w6: JP1.3 639.24,1901.7 1200.16,1901.7 1204.02,1897.84 1206.85,1897.84 1206.85,1591.84 1128.68,1513.67 1128.68,1505.2 1126.92,1503.44 1126.34,1502.86 ccw(c1141.73,1474.8) 1126.34,1446.75 1126.92,1446.17 1128.68,1444.41 1128.68,1419.66 1122.18,1413.16 1119.63,1413.16 1113.12,1406.66 1095.94,1406.66 1093.51,1409.09 1083.61,1409.09 1081.63,1407.11 1081.18,1407.11 1080.73,1406.66 1073,1406.66 U3.34
TX1: JP3.17 U3.30 | length 2238.4
  Top Layer w6: JP3.17 263.06,1802.36 472.63,1592.79 726.57,1592.79 823.29,1496.06 v1(866.14,1496.06)
  Bottom Layer w6: v1(866.14,1496.06) 866.14,1728.77 908.95,1771.57 984.17,1771.57 984.25,1771.65 1259.84,1771.65 1375.47,1656.03 1375.47,1493.58 1220.47,1338.58 1141.73,1338.58 v1(1129.91,1350.4)
TX2: JP4.7 JP5.5 U3.12 | length 1082.3
  Top Layer w6: U3.12 951.27,1034.38 955.38,1034.38 JP5.5 1107.14,926.77 1165.01,868.9 1871.26,868.9 JP4.7
TX3: JP4.15 U3.21 | length 1006.5
  Top Layer w6: U3.21 1156.52,1117.8 1164.69,1117.8 1167.12,1115.37 1433.48,1115.37 JP4.15
U0RX: JP5.2 U2.34 | length 741.1
  Top Layer w6: U2.34 910.04,213.19 884.32,238.91 884.32,684.22 950.15,750.04 986.26,750.04 JP5.2
U0TX: JP5.1 U2.35 | length 737.6
  Top Layer w6: U2.35 910.04,163.19 873.32,199.91 873.32,688.78 962.99,778.44 JP5.1
VBAT: JP3.2 U3.1 | length 1193.8
  Bottom Layer w6: JP3.2 211.13,474.13 211.13,553.76 360.43,703.06 410.62,703.06 473.86,766.29 473.86,861.38 664.47,1051.99 673.85,1051.99 727.84,1105.98 727.84,1115.36 v1(770.81,1158.33)
VCC3V3: C1.1 C2.1 C8.1 JP1.4 JP2.1 JP2.6 JP3.11 JP3.12 JP4.18 L2.1 L3.1 R1.2 R2.2 R6.2 U1.5 U2.2 U3.9 U3.24 U3.36 U3.48 | length 7165.2
  Top Layer w15: U1.5 787.09,549.21 C1.1 ; 727.95,796.97 874.65,943.67 874.65,1039.46 901.07,1065.88 U3.9 1004.92,1171.55 v1(1102.36,1171.55) ; U3.48 791.53,1261.9 817.94,1235.48 860.48,1235.48 884.85,1259.84 v1(944.88,1259.84) ; U3.36 1025.68,1413.2 999.26,1386.78 999.26,1385.22 994.33,1380.3 994.33,1367.87 v1(1023.62,1338.58) v1(1062.99,1299.21) ; v1(1102.36,1220.47) 1137.37,1220.47 U3.24
  Top Layer w20: JP3.11 371.2,870.53 371.2,846.77 391.2,826.77 L3.1 496.33,826.77 L2.1 514.31,811.29 559.31,856.29 668.63,856.29 727.95,796.97 787.27,737.66 C1.1 791.2,549.04 830.09,510.15 830.09,316.35 791.47,277.73 C2.1 799.51,265.76 799.51,224.11 v1(826.77,196.85) ; JP3.12 -7.13,1348.86 -7.13,1821.62 21.65,1850.39 v1(236.22,1850.39) ; U2.2 1622.64,63.19 1639.92,45.91 1647.01,45.91 v1(1653.54,39.37)
  Bottom Layer w15: v1(944.88,1259.84) v1(1023.62,1338.58) ; v1(1062.99,1299.21) 1102.36,1259.84 v1(1102.36,1220.47) v1(1102.36,1171.55)
  Bottom Layer w20: JP3.11 JP3.12 ; v1(236.22,1850.39) 511.81,1850.39 JP2.1 ; v1(393.7,1811.02) 414.96,1832.28 JP2.1 ; JP1.4 554.33,2074.98 529.92,2050.57 JP2.1 ; v1(826.77,196.85) 984.25,39.37 v1(1653.54,39.37) ; JP4.18 1819.1,1911.02 1800.99,1929.13 R2.2 1688.98,1933.07 1650.35,1971.69 1579.52,1971.69 1539.35,1931.53 R1.2 1454.9,1935.46 1416.28,1974.09 1347.36,1974.09 1339.98,1966.71 R6.2 1174.54,1966.71 1054.64,2086.61 826.77,2086.61 629.92,1889.76 JP2.6 JP2.1
pads on no net: U2.4 U2.5 U2.6 U2.7 U2.8 U2.9 U2.10 U2.11 U2.12 U2.13 U2.14 U2.16 U2.17 U2.18 U2.19 U2.20 U2.21 U2.22 U2.23 U2.26 U2.27 U2.28 U2.29 U2.30 U2.31 U2.32 U2.33 U2.36 U2.37 Y1.0

## Silkscreen, mask and mechanical layers (free items; w line width, h text height)
Mechanical 13:
  the board outline again, w5